# EAGLE board minimumSystem brd (EAGLE 7.5.0)
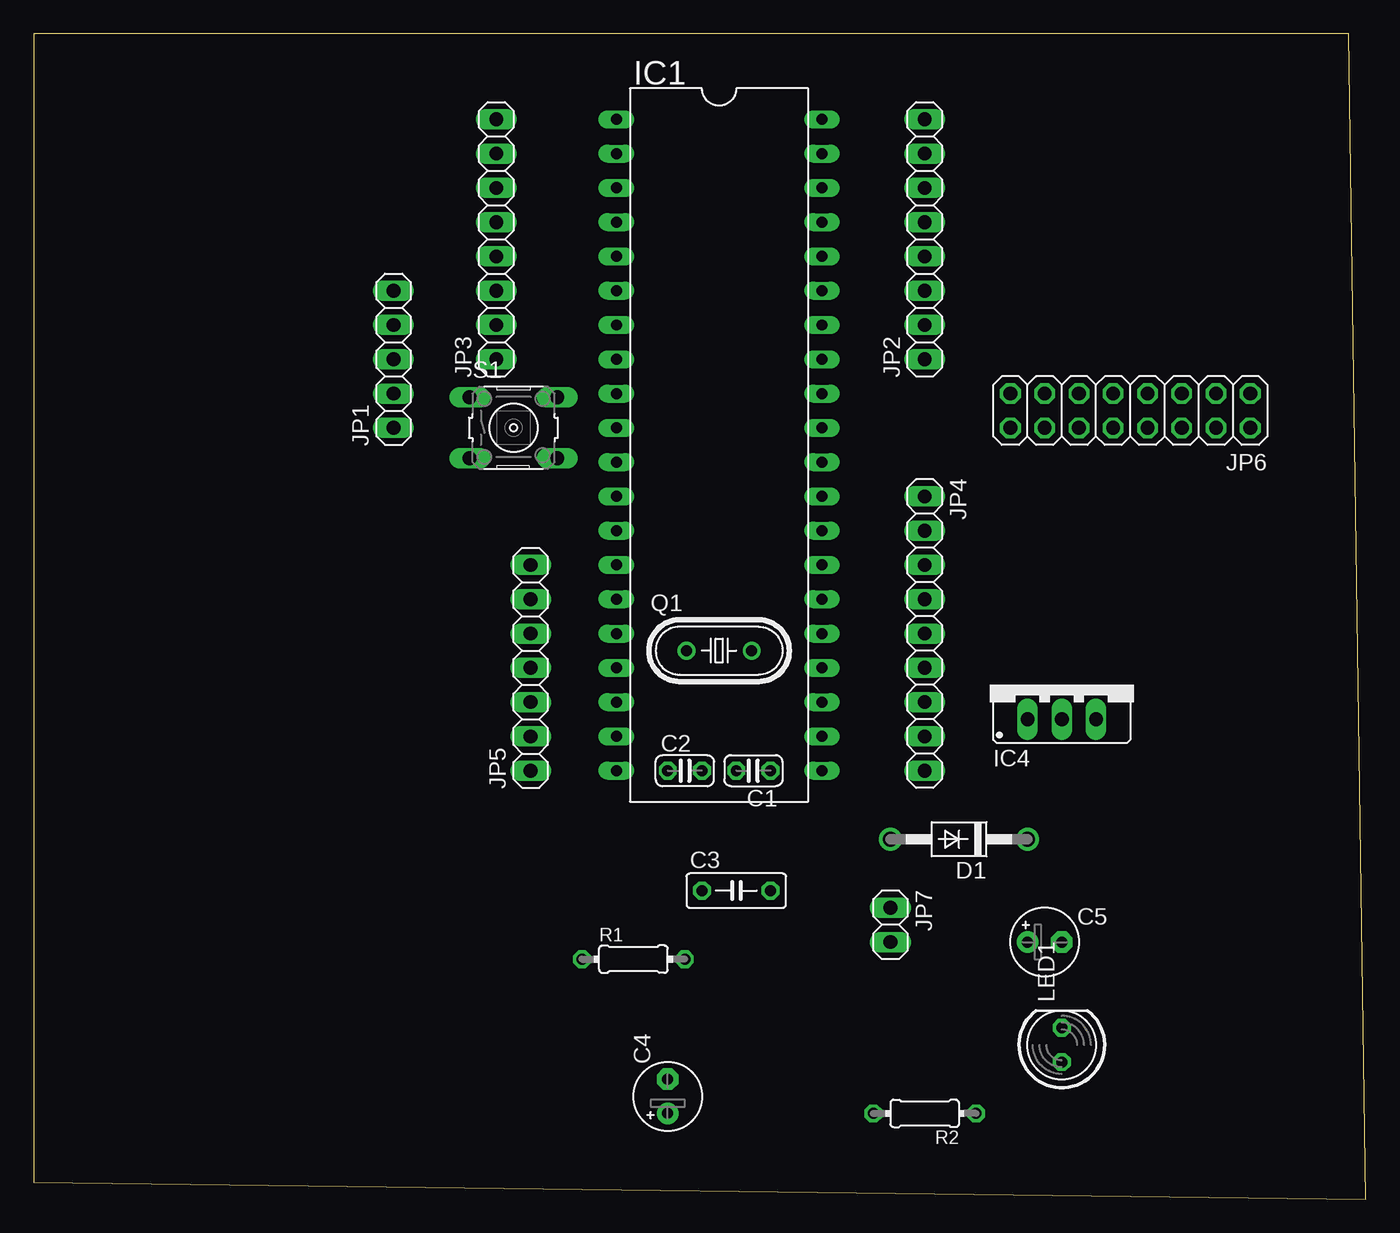
[diagram p0: board, top side]
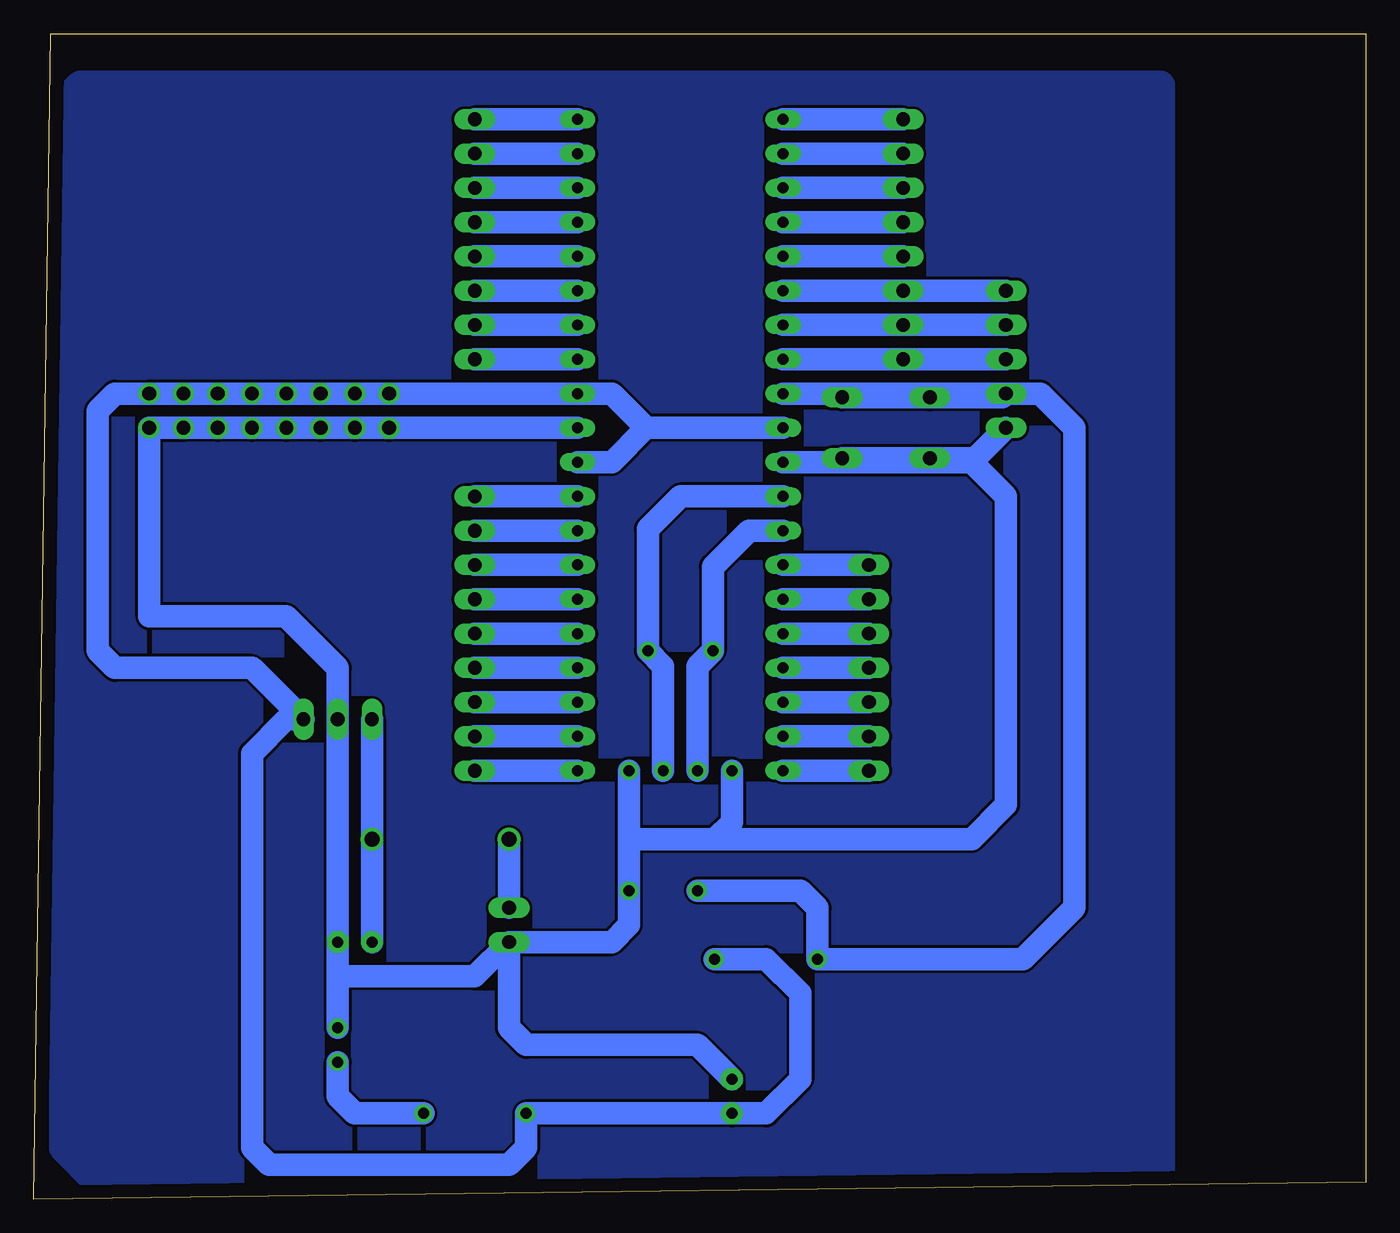
[diagram p1: board, bottom side, seen from below]

Size 98.73 x 86.35 mm. Coordinates in mm from the lower left corner, seen from the top.
Outline: 0,1.27 98.73,0 97.46,86.35 0,86.35 0,1.27
Copper layers (1*16): Top 0.035mm / dielectric 1.5mm / Bottom 0.035mm
Design rules "default": minimum track width 10mil, minimum drill 24mil, track to track 8mil, track to pad 8mil, pad to pad 8mil, via to via 8mil, smd to smd 8mil, copper to edge 40mil, drill to drill 8mil, minimum pad ring 10mil, minimum via ring 8mil, stop-mask expansion 4mil, vias tented up to drill 0mil, thermal gap 10mil

## Footprints (pad centres in the part's own frame; a part is rotated, then mirrored left to right if it is on the bottom)
C025-024X044 = drill 0.813 octagon: 1 -1.27,0; 2 1.27,0
C050-025X075 = drill 0.813 octagon: 1 -2.54,0; 2 2.54,0
E2,5-5 = drill 0.813 pad 1.6: + -1.27,0 | drill 0.813 pad 1.6 octagon: - 1.27,0
DO41-10 = drill 1.118: A 5.08,0; C -5.08,0
DIL40 = drill 0.813 long: 1 -24.13,-7.62; 2 -21.59,-7.62; 3 -19.05,-7.62; 4 -16.51,-7.62; 5 -13.97,-7.62; 6 -11.43,-7.62; 7 -8.89,-7.62; 8 -6.35,-7.62; 9 -3.81,-7.62; 10 -1.27,-7.62; 11 1.27,-7.62; 12 3.81,-7.62; 13 6.35,-7.62; 14 8.89,-7.62; 15 11.43,-7.62; 16 13.97,-7.62; 17 16.51,-7.62; 18 19.05,-7.62; 19 21.59,-7.62; 20 24.13,-7.62; 21 24.13,7.62; 22 21.59,7.62; 23 19.05,7.62; 24 16.51,7.62; 25 13.97,7.62; 26 11.43,7.62; 27 8.89,7.62; 28 6.35,7.62; 29 3.81,7.62; 30 1.27,7.62; 31 -1.27,7.62; 32 -3.81,7.62; 33 -6.35,7.62; 34 -8.89,7.62; 35 -11.43,7.62; 36 -13.97,7.62; 37 -16.51,7.62; 38 -19.05,7.62; 39 -21.59,7.62; 40 -24.13,7.62
78XXS = drill 1.016 long: GND 0,-2.54; IN -2.54,-2.54; OUT 2.54,-2.54
1X05 = drill 1.016 long: 1 -5.08,0; 2 -2.54,0; 3 0,0; 4 2.54,0; 5 5.08,0
1X08 = drill 1.016 long: 1 -8.89,0; 2 -6.35,0; 3 -3.81,0; 4 -1.27,0; 5 1.27,0; 6 3.81,0; 7 6.35,0; 8 8.89,0
1X09 = drill 1.016 long: 1 -10.16,0; 2 -7.62,0; 3 -5.08,0; 4 -2.54,0; 5 0,0; 6 2.54,0; 7 5.08,0; 8 7.62,0; 9 10.16,0
1X07 = drill 1.016 long: 1 -7.62,0; 2 -5.08,0; 3 -2.54,0; 4 0,0; 5 2.54,0; 6 5.08,0; 7 7.62,0
2X08 = drill 1.016 octagon: 1 -8.89,-1.27; 2 -8.89,1.27; 3 -6.35,-1.27; 4 -6.35,1.27; 5 -3.81,-1.27; 6 -3.81,1.27; 7 -1.27,-1.27; 8 -1.27,1.27; 9 1.27,-1.27; 10 1.27,1.27; 11 3.81,-1.27; 12 3.81,1.27; 13 6.35,-1.27; 14 6.35,1.27; 15 8.89,-1.27; 16 8.89,1.27
1X02 = drill 1.016 long: 1 -1.27,0; 2 1.27,0
LED5MM = drill 0.813 octagon: A -1.27,0; K 1.27,0
HC49U-V = drill 0.813: 1 -2.413,0; 2 2.413,0
0204/7 = drill 0.813 octagon: 1 -3.81,0; 2 3.81,0
B3F-10XX = drill 1.016 long: 1 -3.251,2.261; 2 3.251,2.261; 3 -3.251,-2.261; 4 3.251,-2.261

## Placement (x,y rotation side)
C1  [C025-024X044]  53.34,31.75 180 top
C2  [C025-024X044]  48.26,31.75 0 top
C3  [C050-025X075]  52.07,22.86 0 top
C4  [E2,5-5]  46.99,7.62 90 top
C5  [E2,5-5]  74.93,19.05 0 top
D1  1N4004  [DO41-10]  68.58,26.67 180 top
IC1  MEGA16-P  [DIL40]  50.8,55.88 270 top
IC4  [78XXS]  76.2,38.1 0 top
JP1  [1X05]  26.67,62.23 90 top
JP2  [1X08]  66.04,71.12 90 top
JP3  [1X08]  34.29,71.12 90 top
JP4  [1X09]  66.04,41.91 270 top
JP5  [1X07]  36.83,39.37 90 top
JP6  [2X08]  81.28,58.42 180 top
JP7  [1X02]  63.5,20.32 270 top
LED1  [LED5MM]  76.2,11.43 90 top
Q1  [HC49U-V]  50.8,40.64 0 top
R1  [0204/7]  44.45,17.78 0 top
R2  [0204/7]  66.04,6.35 180 top
S1  [B3F-10XX]  35.56,57.15 0 top

## Library data of the parts
C1 C2 C4 C5 R1 R2 = rcl
C3 = resistor
D1 = diode
IC1 = atmel; MPN: ATMEGA16-16PU; OC_FARNELL: 9171142; OC_NEWARK: 01M6885
IC4 = v-reg
JP1-JP7 = pinhead
LED1 = led
Q1 = crystal; OC_FARNELL: 1666969; OC_NEWARK: unknown
S1 = switch-omron; MPN: B3F-1000; OC_FARNELL: 176432; OC_NEWARK: 36M3542

## Nets
+5V: C4.+ IC1.10 IC1.30 IC1.32 IC4.OUT JP6.1 JP6.3 JP6.5 JP6.7 JP6.9 JP6.11 JP6.13 JP6.15 R1.2 R2.2
+12V: D1.A JP7.1
C0: IC1.22 JP4.8
C1: IC1.23 JP4.7
C2: IC1.24 JP4.6
C3: IC1.25 JP4.5
D7: IC1.14 JP5.7
GND: C1.1 C2.1 C3.2 C4.- C5.- IC1.11 IC1.31 IC4.GND JP1.1 JP6.2 JP6.4 JP6.6 JP6.8 JP6.10 JP6.12 JP6.14 JP6.16 JP7.2 LED1.K S1.3 S1.4
N$1: IC1.33 JP2.1
N$2: IC1.34 JP2.2
N$3: IC1.35 JP2.3
N$4: IC1.36 JP2.4
N$5: IC1.37 JP2.5
N$6: IC1.38 JP2.6
N$7: IC1.39 JP2.7
N$8: IC1.40 JP2.8
N$11: IC1.29 JP4.1
N$12: IC1.28 JP4.2
N$13: IC1.27 JP4.3
N$14: IC1.5 JP3.4
N$15: IC1.20 JP5.1
N$16: IC1.19 JP5.2
N$19: IC1.26 JP4.4
N$20: IC1.6 JP1.5 JP3.3
N$21: IC1.4 JP3.5
N$22: IC1.3 JP3.6
N$23: IC1.2 JP3.7
N$24: IC1.1 JP3.8
N$25: C5.+ D1.C IC4.IN
N$30: IC1.15 JP5.6
N$31: IC1.16 JP5.5
N$32: IC1.17 JP5.4
N$33: C3.1 IC1.9 JP1.2 R1.1 S1.1 S1.2
N$34: IC1.18 JP5.3
N$35: C1.2 IC1.12 Q1.2
N$36: C2.2 IC1.13 Q1.1
N$37: LED1.A R2.1
N$46: IC1.8 JP1.3 JP3.1
N$47: IC1.7 JP1.4 JP3.2
RS: IC1.21 JP4.9

## Tracks (layer width: path | path; a pad name or v marks a point on that pad's centre or on a via)
+5V
  Bottom 1.676: 53.34,57.15 55.88,59.69 IC1.32 JP6.15 JP6.13 JP6.11 JP6.9 JP6.7 JP6.5 JP6.3 JP6.1 92.71,59.69 93.98,58.42 93.98,40.64 92.71,39.37 82.55,39.37 IC4.OUT 80.01,35.56 82.55,33.02 82.55,3.81 81.28,2.54 63.5,2.54 62.23,3.81 R2.2 C4.+ 44.45,6.35 41.91,8.89 41.91,15.24 44.45,17.78 R1.2 | IC1.10 53.34,57.15 | 53.34,57.15 55.88,54.61 IC1.30
+12V
  Bottom 1.676: D1.A JP7.1
C0
  Bottom 1.676: IC1.22 JP4.8
C1
  Bottom 1.676: IC1.23 JP4.7
C2
  Bottom 1.676: IC1.24 JP4.6
C3
  Bottom 1.676: IC1.25 JP4.5
D7
  Bottom 1.676: JP5.7 IC1.14
GND
  Bottom 1.676: IC1.31 JP6.16 JP6.14 JP6.12 JP6.10 JP6.8 JP6.6 JP6.4 JP6.2 90.17,43.18 80.01,43.18 76.2,39.37 IC4.GND C5.- 76.2,16.51 | JP1.1 28.93,54.89 S1.3 S1.4 39.09,54.61 IC1.11 29.21,54.61 26.67,52.07 26.67,29.21 29.21,26.67 48.26,26.67 | 54.61,26.67 C3.2 54.61,20.32 55.88,19.05 JP7.2 | 54.61,26.67 C1.1 | 76.2,16.51 LED1.K | C2.1 46.99,27.94 48.26,26.67 | 48.26,26.67 54.61,26.67 | C4.- 49.53,11.43 62.23,11.43 63.5,12.7 JP7.2 | JP7.2 66.04,16.51 76.2,16.51
N$1
  Bottom 1.676: IC1.33 JP2.1
N$2
  Bottom 1.676: IC1.34 JP2.2
N$3
  Bottom 1.676: IC1.35 JP2.3
N$4
  Bottom 1.676: IC1.36 JP2.4
N$5
  Bottom 1.676: IC1.37 JP2.5
N$6
  Bottom 1.676: IC1.38 JP2.6
N$7
  Bottom 1.676: IC1.39 JP2.7
N$8
  Bottom 1.676: IC1.40 JP2.8
N$9
  pour Bottom: 15.24,82.55 95.25,82.55 96.52,81.28 96.52,3.81 93.98,1.27 15.24,1.27
N$11
  Bottom 1.676: IC1.29 JP4.1
N$12
  Bottom 1.676: IC1.28 JP4.2
N$13
  Bottom 1.676: IC1.27 JP4.3
N$14
  Bottom 1.676: JP3.4 IC1.5
N$15
  Bottom 1.676: JP5.1 IC1.20
N$16
  Bottom 1.676: JP5.2 IC1.19
N$19
  Bottom 1.676: IC1.26 JP4.4
N$20
  Bottom 1.676: IC1.6 JP3.3 JP1.5
N$21
  Bottom 1.676: JP3.5 IC1.4
N$22
  Bottom 1.676: JP3.6 IC1.3
N$23
  Bottom 1.676: JP3.7 IC1.2
N$24
  Bottom 1.676: JP3.8 IC1.1
N$25
  Bottom 1.676: IC4.IN D1.C C5.+
N$30
  Bottom 1.676: JP5.6 IC1.15
N$31
  Bottom 1.676: JP5.5 IC1.16
N$32
  Bottom 1.676: JP5.4 IC1.17
N$33
  Bottom 1.676: JP1.2 26.95,59.41 S1.1 S1.2 39.09,59.69 IC1.9 JP1.2 | JP1.2 24.13,59.69 21.59,57.15 21.59,21.59 25.4,17.78 R1.1 40.64,21.59 41.91,22.86 C3.1
N$34
  Bottom 1.676: JP5.3 IC1.18
N$35
  Bottom 1.676: IC1.12 50.8,52.07 53.21,49.66 Q1.2 52.07,39.5 C1.2
N$36
  Bottom 1.676: IC1.13 45.72,49.53 48.39,46.86 Q1.1 49.53,39.5 C2.2
N$37
  Bottom 1.676: R2.1 74.93,6.35 76.2,7.62 LED1.A
N$46
  Bottom 1.676: JP1.3 JP3.1 IC1.8
N$47
  Bottom 1.676: JP1.4 JP3.2 IC1.7
RS
  Bottom 1.676: IC1.21 JP4.9